# EAGLE board motor_controller (EAGLE 5.11)
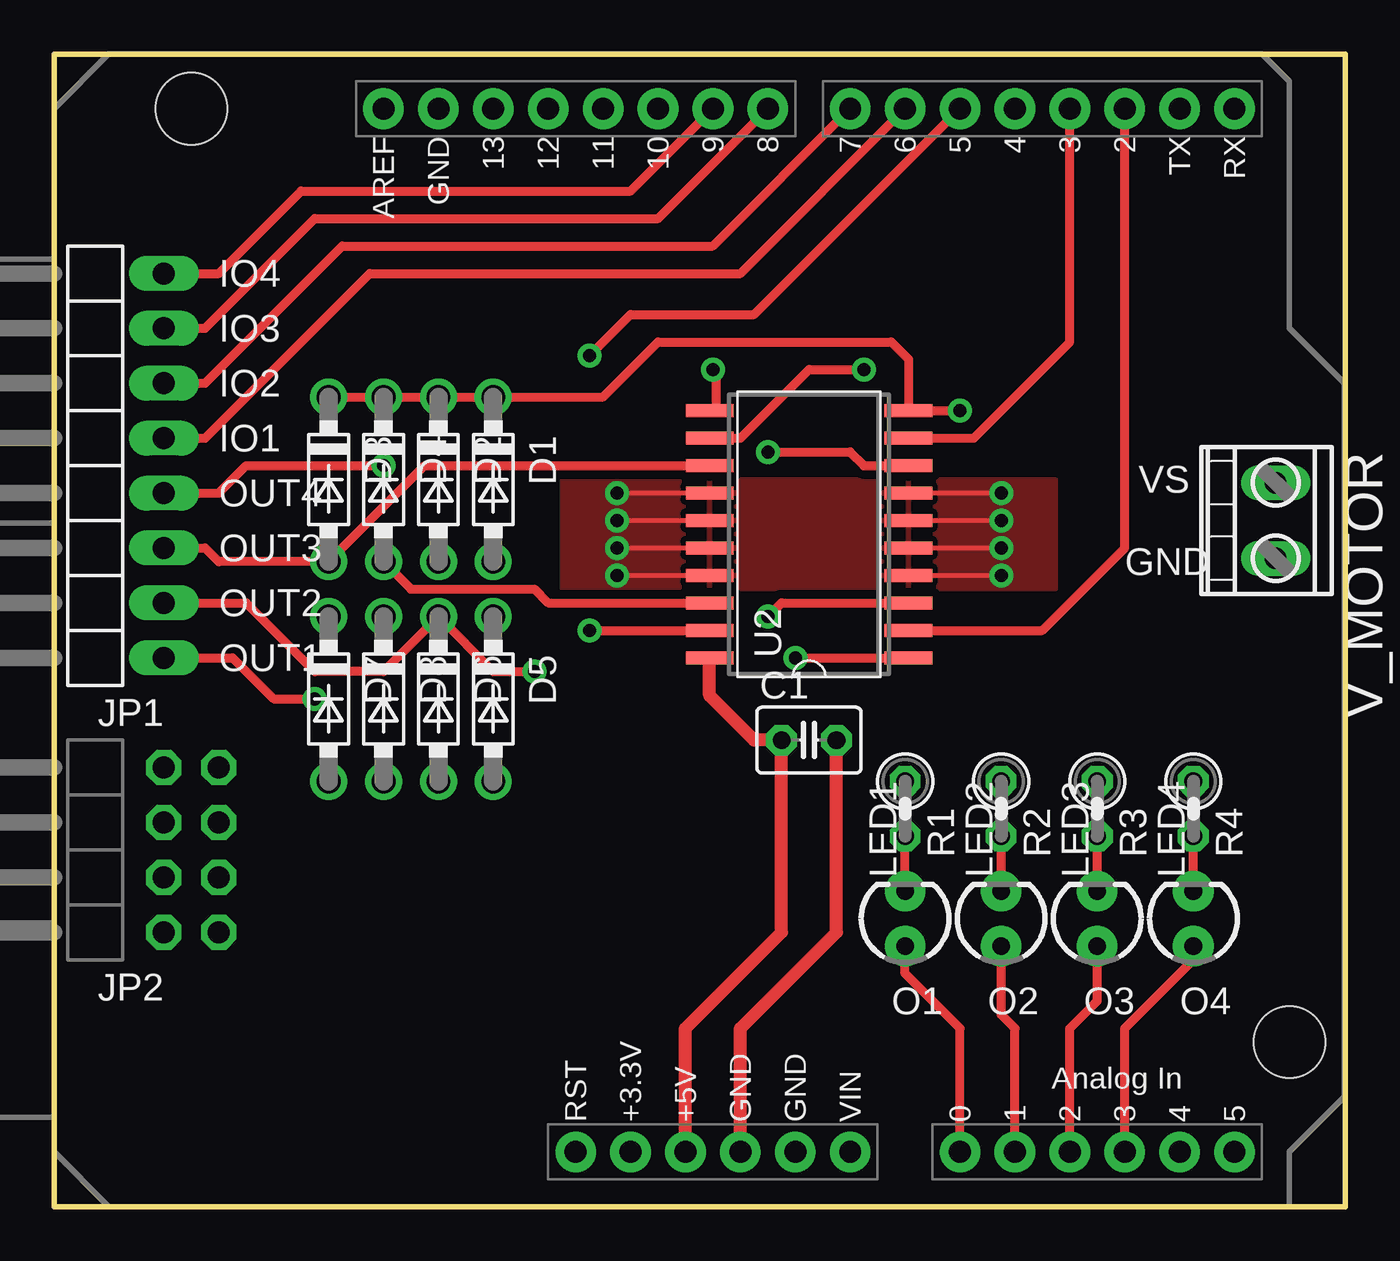
[diagram p0: board, top side]
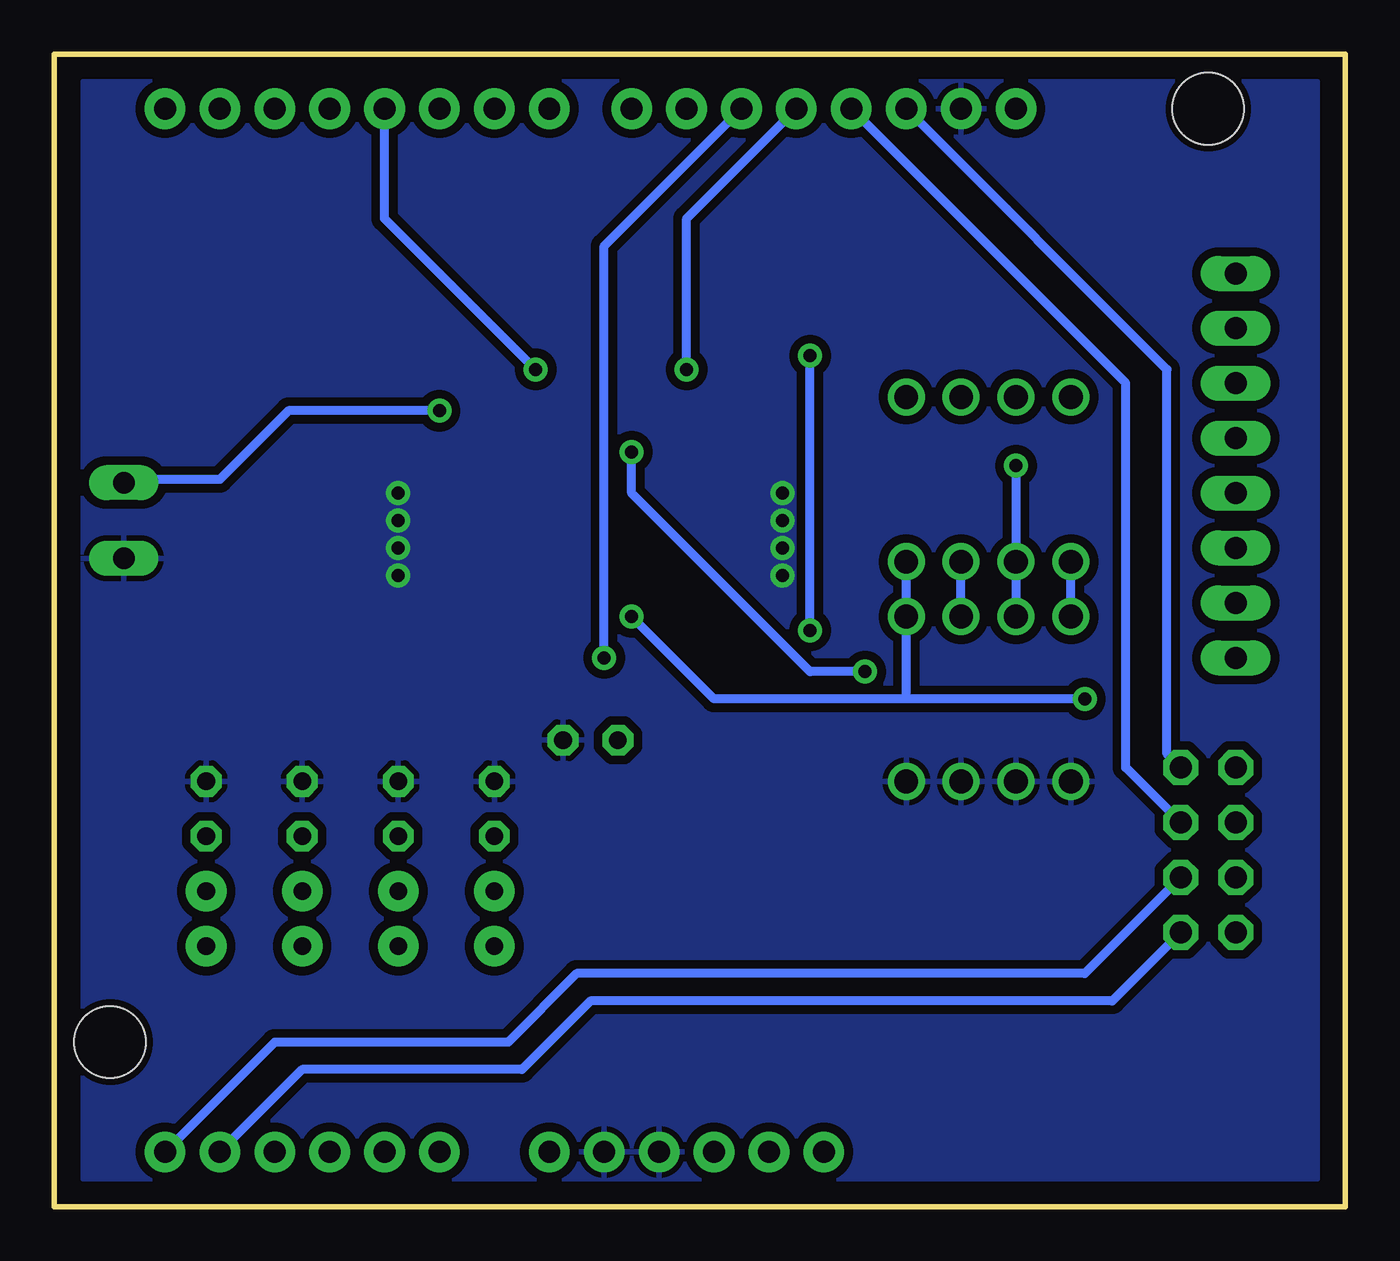
[diagram p1: board, bottom side, seen from below]

Size 59.74 x 53.33 mm. Coordinates in mm from the lower left corner, seen from the top.
Outline: 0,0 59.74,0 59.74,53.33 0,53.33 0,0
Copper layers (1*16): Top 0.035mm / dielectric 1.5mm / Bottom 0.035mm
Design rules "SparkFun_via *": minimum track width 8mil, minimum drill 20mil, track to track 16mil, track to pad 16mil, pad to pad 16mil, via to via 16mil, smd to smd 8mil, copper to edge 10mil, drill to drill 8mil, minimum pad ring 12mil, minimum via ring 10mil, stop-mask expansion 4mil, vias tented up to drill 25mil, thermal gap 10mil

## Footprints (pad centres in the part's own frame; a part is rotated, then mirrored left to right if it is on the bottom)
C025-030X050 = drill 0.813 octagon: 1 -1.27,0; 2 1.27,0
DO41-7.6 = drill 1.1 pad 1.7 round: A 3.81,0; C -3.81,0
1X08/90 = drill 1.016 long: 1 -8.89,-3.81; 2 -6.35,-3.81; 3 -3.81,-3.81; 4 -1.27,-3.81; 5 1.27,-3.81; 6 3.81,-3.81; 7 6.35,-3.81; 8 8.89,-3.81
2X04/90 = drill 1.016 octagon: 1 -3.81,-6.35; 2 -3.81,-3.81; 3 -1.27,-6.35; 4 -1.27,-3.81; 5 1.27,-6.35; 6 1.27,-3.81; 7 3.81,-6.35; 8 3.81,-3.81
LED3MM = drill 0.813 pad 1.88 round: A -1.27,0; K 1.27,0
0207/2V = drill 0.813 octagon: 1 -1.27,0; 2 1.27,0
DUEMILANOVE_SHIELD = drill 1.016 pad 1.88 round: 3.3V 50.8,26.67; 5V 50.8,29.21; A0 50.8,41.91; A1 50.8,44.45; A2 50.8,46.99; A3 50.8,49.53; A4 50.8,52.07; A5 50.8,54.61; AREF 2.54,15.24; D2 2.54,49.53; D3 2.54,46.99; D4 2.54,44.45; D5 2.54,41.91; D6 2.54,39.37; D7 2.54,36.83; D8 2.54,33.02; D9 2.54,30.48; D10 2.54,27.94; D11 2.54,25.4; D12 2.54,22.86; D13 2.54,20.32; GND@0 50.8,31.75; GND@1 50.8,34.29; GND@2 2.54,17.78; RES 50.8,24.13; RX 2.54,54.61; TX 2.54,52.07; VIN 50.8,36.83 | hole 3.302: 45.72,57.15; 2.54,6.35
SO20 = smd 0.6 x 2.2: 1 -5.715,-4.6; 2 -4.445,-4.6; 3 -3.175,-4.6; 4 -1.905,-4.6; 5 -0.635,-4.6; 6 0.635,-4.6; 7 1.905,-4.6; 8 3.175,-4.6; 9 4.445,-4.6; 10 5.715,-4.6; 11 5.715,4.6; 12 4.445,4.6; 13 3.175,4.6; 14 1.905,4.6; 15 0.635,4.6; 16 -0.635,4.6; 17 -1.905,4.6; 18 -3.175,4.6; 19 -4.445,4.6; 20 -5.715,4.6
AK550/2 = drill 1 pad 1.5 long: 1 -1.75,0; 2 1.75,0

## Placement (x,y rotation side)
C1  [C025-030X050]  34.92,21.59 0 top
D1  1N5819-B  [DO41-7.6]  20.32,33.66 270 top
D2  1N5819-B  [DO41-7.6]  17.78,33.66 270 top
D3  1N5819-B  [DO41-7.6]  12.7,33.66 270 top
D4  1N5819-B  [DO41-7.6]  15.24,33.66 270 top
D5  1N5819-B  [DO41-7.6]  20.32,23.5 270 top
D6  1N5819-B  [DO41-7.6]  17.78,23.5 270 top
D7  1N5819-B  [DO41-7.6]  12.7,23.5 270 top
D8  1N5819-B  [DO41-7.6]  15.24,23.5 270 top
JP1  [1X08/90]  1.27,34.29 90 top
JP2  [2X04/90]  1.27,16.51 90 top
LED1  [LED3MM]  39.37,13.34 90 top
LED2  [LED3MM]  43.81,13.34 90 top
LED3  [LED3MM]  48.26,13.34 90 top
LED4  [LED3MM]  52.7,13.34 90 top
R1  220  [0207/2V]  39.37,18.41 270 top
R2  220  [0207/2V]  43.81,18.41 270 top
R3  220  [0207/2V]  48.26,18.41 270 top
R4  220  [0207/2V]  52.7,18.41 270 top
U1  ARDUINO_SHIELDLABEL  [DUEMILANOVE_SHIELD]  0,53.34 270 top
U2  L293DD  [SO20]  34.92,31.11 90 top
V_MOTOR  AK550/2  [AK550/2]  56.52,31.75 270 top

## Library data of the parts
C1 R1-R4 = rcl
D1-D8 = diode
JP1 JP2 U2 = CyberRailGuru
LED1-LED4 U1 = SparkFun
V_MOTOR = con-ptr500; OC_FARNELL: unknown; OC_NEWARK: unknown

## Nets
D0: U1.D2 U2.2
D1: U1.D3 U2.9
D2: U1.D4 U2.12
D3: U1.D5 U2.19
D4: JP1.5 U1.D6
D5: JP1.6 U1.D7
D6: JP1.7 U1.D8
D7: JP1.8 U1.D9
EN1_2_PWM: U1.D10 U2.1
EN3_4_PWM: U1.D11 U2.11
GND: C1.2 D5.A D6.A D7.A D8.A R1.1 R2.1 R3.1 R4.1 U1.GND@0 U1.GND@1 U1.GND@2 U2.4 U2.5 U2.6 U2.7 U2.14 U2.15 U2.16 U2.17 V_MOTOR.2
INPUT1: JP2.5 U1.D12
INPUT2: JP2.7 U1.D13
INPUT3: JP2.1 U1.A4
INPUT4: JP2.3 U1.A5
LED1: LED1.A U1.A0
LED2: LED2.A U1.A1
LED3: LED3.A U1.A2
LED4: LED4.A U1.A3
N$5: LED1.K R1.2
N$6: LED2.K R2.2
N$7: LED3.K R3.2
N$8: LED4.K R4.2
OUT1: D1.A D5.C JP1.1 U2.3
OUT2: D2.A D6.C JP1.2 U2.8
OUT3: D3.A D7.C JP1.3 U2.13
OUT4: D4.A D8.C JP1.4 U2.18
V_MOTOR: D1.C D2.C D3.C D4.C U2.10 V_MOTOR.1
VCC: C1.1 U1.5V U2.20

## Tracks (layer width: path | path; a pad name or v marks a point on that pad's centre or on a via)
D0
  Top 0.406: U1.D2 49.53,30.48 45.72,26.67 U2.2
D1
  Top 0.406: U2.9 42.55,35.56 46.99,40.01 U1.D3
D2  (via drill 0.6)
  Top 0.406: U2.12 31.75,35.56 34.92,38.73 v37.47,38.73
  Bottom 0.406: v37.47,38.73 44.45,45.72 U1.D4
D3  (via drill 0.6)
  Top 0.406: v24.77,26.67 U2.19 | v24.77,39.37 26.67,41.27 32.38,41.27 U1.D5
  Bottom 0.406: v24.77,26.67 v24.77,39.37
D4
  Top 0.406: JP1.5 6.99,35.56 14.61,43.18 31.75,43.18 U1.D6
D5
  Top 0.406: JP1.6 6.99,38.1 13.34,44.45 30.48,44.45 U1.D7
D6
  Top 0.406: JP1.7 6.99,40.64 12.06,45.72 27.94,45.72 U1.D8
D7
  Top 0.406: JP1.8 7.62,43.18 11.43,46.99 26.67,46.99 U1.D9
EN1_2_PWM  (via drill 0.6)
  Top 0.406: v34.29,25.4 U2.1
  Bottom 0.406: U1.D10 34.29,44.45 v34.29,25.4
EN3_4_PWM  (via drill 0.6)
  Top 0.406: U2.11 30.64,36.83 30.64,38.58 v30.48,38.73
  Bottom 0.406: U1.D11 30.48,45.72 v30.48,38.73
GND  (via drill 0.6)
  Top 0.203: v26.04,31.75 U2.15 | v26.04,30.48 U2.16 | v26.04,29.21 U2.17 | U2.7 v43.81,33.02 | U2.6 v43.81,31.75 | U2.5 v43.81,30.48 | U2.4 v43.81,29.21 | v26.04,33.02 U2.14
  Top 0.61: U1.GND@0 31.75,8.26 36.2,12.7 C1.2
  pour Bottom: 1.27,1.27 1.27,5.71 1.27,26.67 1.27,47.62 1.27,52.07 58.42,52.07 58.42,34.92 58.42,1.27
  pour Top: 23.5,33.66 46.35,33.66 46.35,28.57 23.5,28.57
INPUT1
  Bottom 0.406: JP2.5 10.16,20.32 10.16,38.1 U1.D12
INPUT2
  Bottom 0.406: JP2.7 8.26,20.95 8.26,38.73 U1.D13
INPUT3
  Bottom 0.406: JP2.1 10.79,9.53 34.92,9.53 38.1,6.35 48.26,6.35 U1.A4
INPUT4
  Bottom 0.406: JP2.3 12.06,10.79 35.56,10.79 38.73,7.62 49.53,7.62 U1.A5
LED1
  Top 0.406: U1.A0 41.91,8.26 39.37,10.79 LED1.A
LED2
  Top 0.406: U1.A1 44.45,8.26 43.81,8.89 LED2.A
LED3
  Top 0.406: U1.A2 46.99,8.26 48.26,9.53 LED3.A
LED4
  Top 0.406: U1.A3 49.53,8.26 52.7,11.43 LED4.A
N$5
  Top 0.406: LED1.K R1.2
N$6
  Top 0.406: LED2.K R2.2
N$7
  Top 0.406: LED3.K R3.2
N$8
  Top 0.406: LED4.K R4.2
OUT1  (via drill 0.6)
  Top 0.406: U2.3 33.66,27.94 v33.02,27.3 | v12.06,23.5 10.16,23.5 8.26,25.4 JP1.1
  Bottom 0.406: v33.02,27.3 29.21,23.5 20.32,23.5 | 20.32,23.5 D5.C D1.A | v12.06,23.5 20.32,23.5
OUT2  (via drill 0.6)
  Top 0.406: U2.8 37.47,34.29 36.83,34.92 v33.02,34.92 | JP1.2 8.89,27.94 12.06,24.77 15.24,24.77 D6.C 20.32,24.77 v22.23,24.77
  Bottom 0.406: v33.02,34.92 33.02,33.02 24.77,24.77 v22.23,24.77 | D6.C D2.A
OUT3
  Top 0.406: JP1.3 6.99,30.48 7.62,29.84 D3.A 17.14,34.29 U2.13
  Bottom 0.406: D7.C D3.A
OUT4  (via drill 0.6)
  Top 0.406: U2.18 22.86,27.94 22.23,28.57 16.51,28.57 D4.A | JP1.4 7.62,33.02 8.89,34.29 v15.24,34.29
  Bottom 0.406: D8.C D4.A v15.24,34.29
V_MOTOR  (via drill 0.6)
  Top 0.406: v41.91,36.83 U2.10 39.52,39.22 38.73,40.01 27.94,40.01 25.4,37.47 D1.C D2.C D3.C D4.C
  Bottom 0.406: v41.91,36.83 48.9,36.83 52.07,33.66 56.36,33.66 V_MOTOR.1
VCC
  Top 0.61: U1.5V 29.21,8.26 33.66,12.7 C1.1 32.38,21.59 30.32,23.65 U2.20

## Text on the board
tPlace: IO4 | IO3 | IO2 | IO1 | VS | OUT4 | OUT3 | GND | OUT2 | OUT1 | O1 | O2 | O3 | O4